# Altium PCB esp32_breakout.PcbDoc
Units mm, origin at the board's own origin, x right, y up, seen from the top; angles counter-clockwise.
Board outline 90.17 x 69.98 mm, 2 copper layers (Top Layer, Bottom Layer), stack 1.569 mm thick; 23 components, 47 nets, 114 pads, 0 vias.
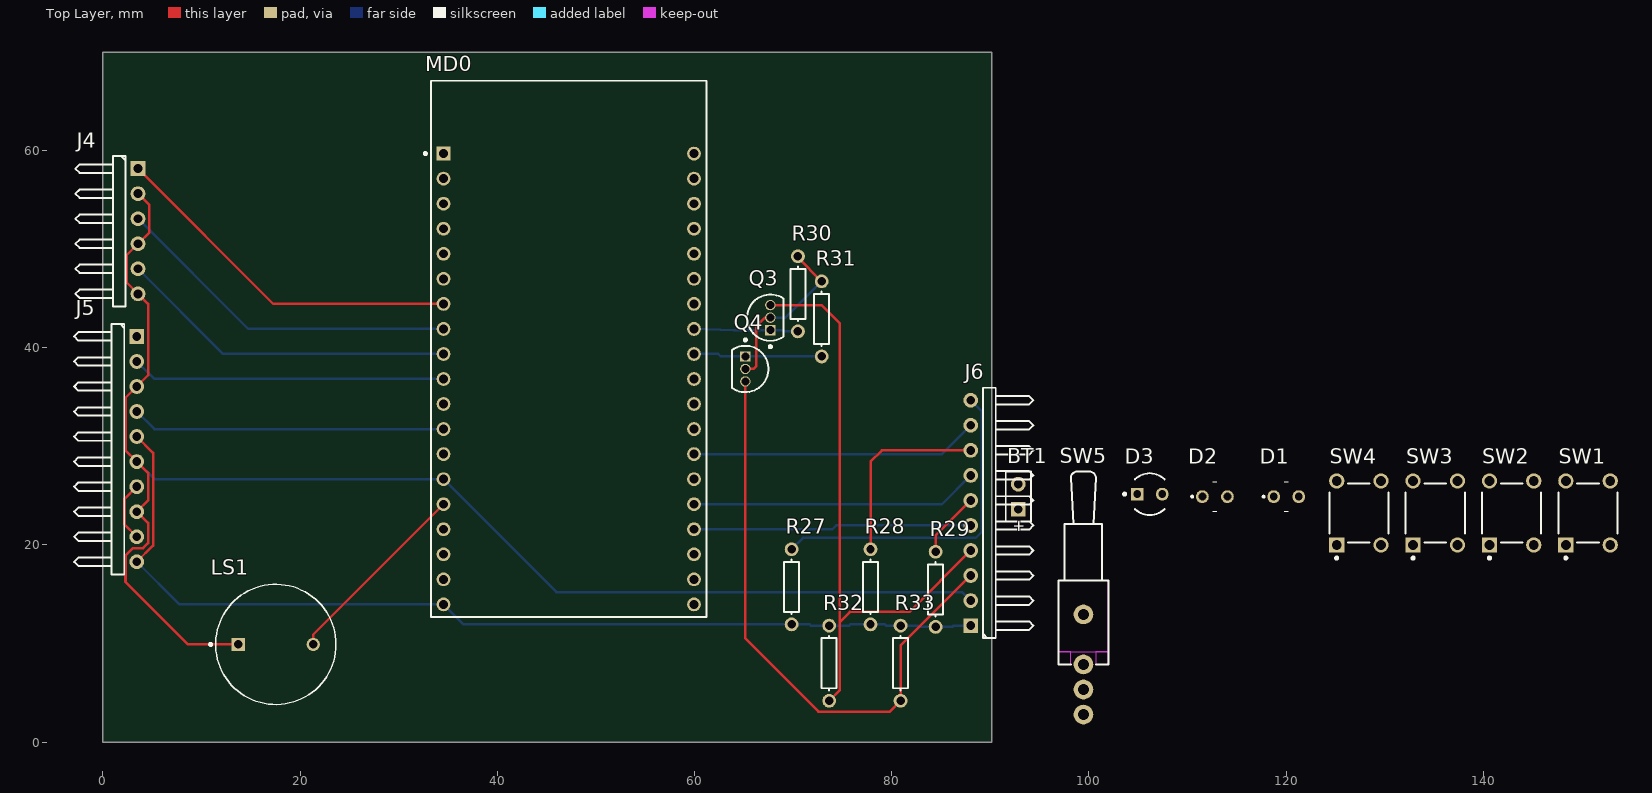
[diagram p0: Top Layer view]
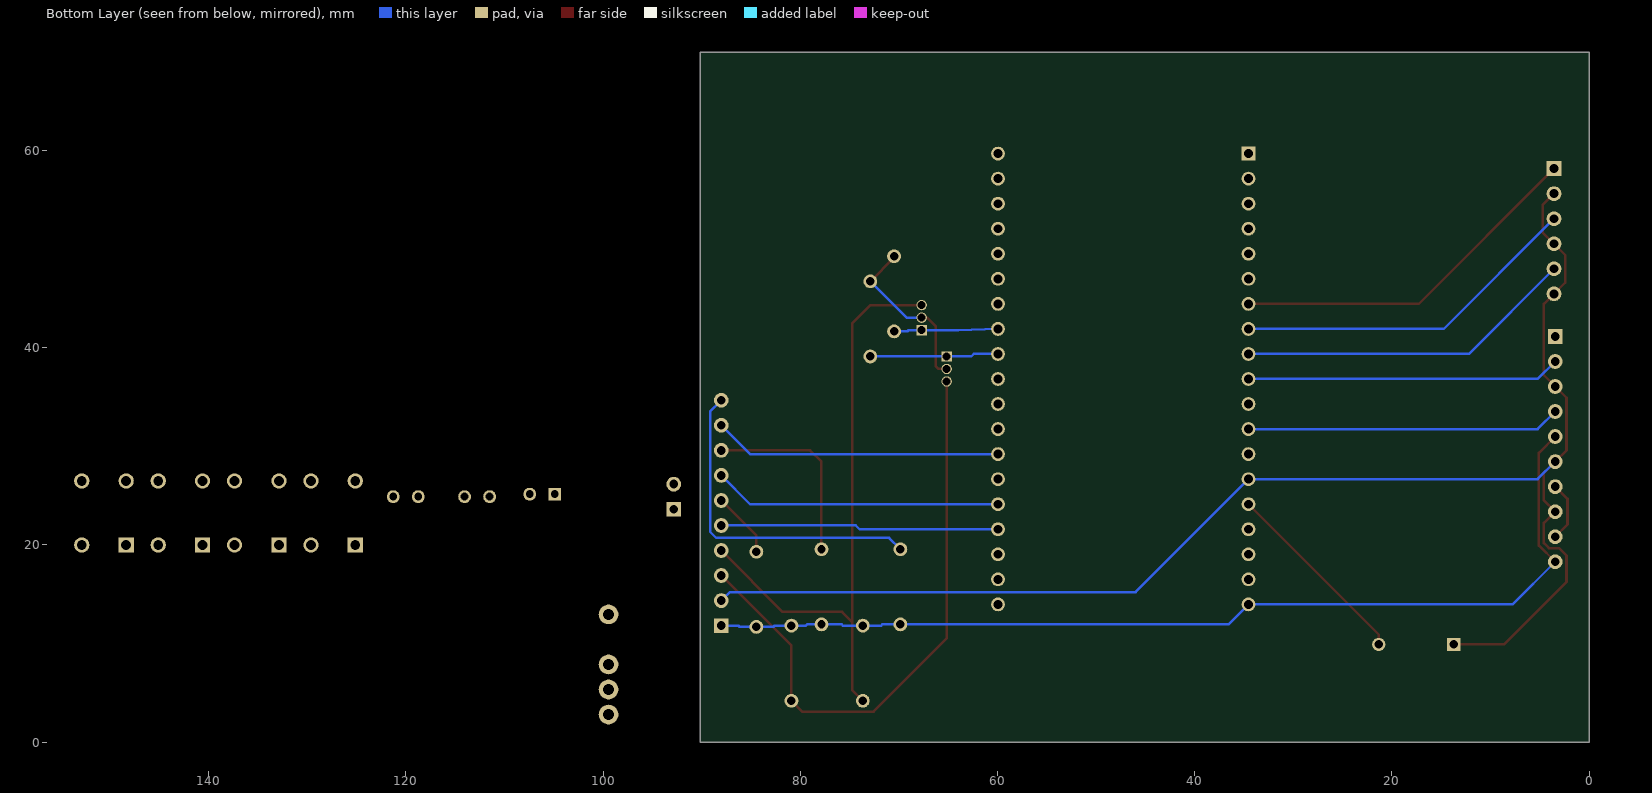
[diagram p1: Bottom Layer view, seen from below]

## Layer stack, top to bottom
Top Solder: solder mask 0.0254, SM-001, Dk 4
Top Layer: signal copper 0.035
Dielectric 1: core 1.4986, Core-043, Dk 4.3
Bottom Layer: signal copper 0.035
Bottom Solder: solder mask 0.0254, SM-001, Dk 4

## Board outline
0,0 90.17,0 90.17,69.977 0,69.977

## Design rules (kind name [scope] priority, off if disabled: settings)
Clearance [All] p1: gap=0.254 ignorepadtopadclearanceinfootprint=FALSE except(0: Arc-Hole Track-Hole SMDPad-Hole THPad-Hole Via-Hole Fill-Hole Poly-Hole Region-Hole Text-Hole)
PolygonConnect [All] p1: connectstyle=Relief reliefconductorwidth=0.254 reliefentries=4 polygonreliefangle="90 Angle" airgapwidth=0.254
RoomDefinition tinee_timer [InComponentClass('tinee_timer')] p1: confinementstyle=ConfineIn formatcopy=TRUE lockcomponents=FALSE outline 91.313,1.524 154.051,1.524 154.051,30.226 91.313,30.226
RoomDefinition U_ESP32_DevKitC_v4_shim [InComponentClass('U_ESP32_DevKitC_v4_shim')] p2: confinementstyle=ConfineIn formatcopy=TRUE lockcomponents=FALSE outline 91.313,31.242 120.65,31.242 120.65,88.9 91.313,88.9
RoomDefinition U_esp32_breakout [InComponentClass('U_esp32_breakout')] p3: confinementstyle=ConfineIn formatcopy=TRUE lockcomponents=FALSE outline 91.313,1.524 184.912,1.524 184.912,29.972 91.313,29.972
RoutingVias [All] p1: holewidth=0.711 width=1.27 viastyle="Through Hole" minholewidth=0.711 minwidth=1.27 maxholewidth=0.711 maxwidth=1.27
SolderMaskExpansion [All] p1: expansion=0.102 istentingtop=FALSE
Width [All] p1: maxlimit=0.254 minlimit=0.254 preferedwidth=0.254
30 further rules are at their usual default settings.

## Classes and differential pairs
component class tinee_timer: BT1 D1 D2 D3 LX-LCBST MG90S SW1 SW2 SW3 SW4 SW5 U1
component class U_ESP32_DevKitC_v4_shim: MD0
component class U_esp32_breakout: J4 J5 J6 LS1 Q3 Q4 R27 R28 R29 R30 R31 R32 R33

## Components (designator, comment, footprint, x,y, rotation, side; value= is the part's Value field where it differs from the comment)
BT1 "Battery" BAT-2 92.837,24.892 r90 top
D1 "LTL-4236N" LTL4236N 118.745,24.892 r0 top
D2 "LTL-4251N" LTL4236N 111.506,24.892 r0 top
D3 "LTL-4222" FP-LTL-4222-MFG 106.172,25.146 r0 top
J4 "Header 6H" HDR1X6H 3.556,58.166 r270 top
J5 "Header 10H" HDR1X10H 3.429,41.148 r270 top
J6 "Header 10H" HDR1X10H 88.011,11.811 r90 top
LS1 "AI-1223-TWT-3V-2-R" FP-AI-1223-TWT-3V-2-R-MFG 17.526,9.906 r0 top
MD0 "ESP32-DevKitC V4" FP-ESP32-DevKitC_V4-MFG 47.244,39.878 r0 top
Q3 "2N7000" ONSC-TO-92-3-29-11 67.691,43.053 r90 top
Q4 "2N7000" ONSC-TO-92-3-29-11 65.151,37.846 r270 top
R27 "Res1" AXIAL-0.3 69.85,15.748 r270 top value=270
R28 "Res1" AXIAL-0.3 77.851,15.748 r270 top value=270
R29 "Res1" AXIAL-0.3 84.455,15.494 r270 top value=270
R30 "Res1" AXIAL-0.3 70.485,45.466 r270 top value=270
R31 "Res1" AXIAL-0.3 72.898,42.926 r90 top value=270
R32 "Res1" AXIAL-0.3 73.66,8.001 r90 top value=270
R33 "Res1" AXIAL-0.3 80.899,8.001 r90 top value=270
SW1 "MJTP1230A" FP-MJTP1230A-MFG 150.622,23.241 r90 top
SW2 "MJTP1230A" FP-MJTP1230A-MFG 142.875,23.241 r90 top
SW3 "MJTP1230A" FP-MJTP1230A-MFG 135.128,23.241 r90 top
SW4 "MJTP1230A" FP-MJTP1230A-MFG 127.381,23.241 r90 top
SW5 "SW-SPDT" TL36WW15050 99.441,7.874 r90 top

## Footprints (in the part's own frame and the unit in brackets; to place one, negate y for a bottom-side part, rotate by r counter-clockwise, add the part's x,y. Pads: shape width x height; smd on the part's side, far side on the other; paste and mask are expansions set on the pad)
AXIAL-0.3 [mm] "Axial Device, Thru-Hole; 2 Leads; 0.3 in Pin Spacing"
  round 1.4 hole 0.85: 1(-3.81,0) 2(3.81,0)
  silkscreen extent -2.77,-0.76 2.77,0.76
BAT-2 [mm] "Battery; 2 Leads"
  rect 1.5x1.5 hole 0.9: 1(-1.27,0)
  round 1.5 hole 0.9: 2(1.27,0)
  silkscreen extent -2.54,-1.27 2.54,1.27
FP-AI-1223-TWT-3V-2-R-MFG [mm]
  rect 1.35x1.35 hole 0.85 paste-1000 mask+0: 1(-3.8,0)
  round 1.35 hole 0.85 paste-1000 mask+0: 2(3.8,0)
  silkscreen extent -6.72,-6.1 6.1,6.1, body extent -6.2,-6.2 6.2,6.2, height 0.25
FP-ESP32-DevKitC_V4-MFG [mm]
  rect 1.4x1.4 hole 0.9 paste-1000 mask+0: 1(-12.7,19.81)
  round 1.4 hole 0.9 paste-1000 mask+0: 2(-12.7,17.27) 3(-12.7,14.73) 4(-12.7,12.19) 5(-12.7,9.65) 6(-12.7,7.11) 7(-12.7,4.57) 8(-12.7,2.03) 9(-12.7,-0.51) 10(-12.7,-3.05) 11(-12.7,-5.59) 12(-12.7,-8.13) 13(-12.7,-10.67) 14(-12.7,-13.21) 15(-12.7,-15.75) 16(-12.7,-18.29) 17(-12.7,-20.83) 18(-12.7,-23.37) 19(-12.7,-25.91) 20(12.7,-25.91) 21(12.7,-23.37) 22(12.7,-20.83) 23(12.7,-18.29) 24(12.7,-15.75) 25(12.7,-13.21) 26(12.7,-10.67) 27(12.7,-8.13) 28(12.7,-5.59) 29(12.7,-3.05) 30(12.7,-0.51) 31(12.7,2.03) 32(12.7,4.57) 33(12.7,7.11) 34(12.7,9.65) 35(12.7,12.19) 36(12.7,14.73) 37(12.7,17.27) 38(12.7,19.81)
  silkscreen extent -14.67,-27.2 13.95,27.2, body extent -14.05,-27.3 14.05,27.3, height 0.25
FP-LTL-4222-MFG [mm]
  rect 1.3x1.3 hole 0.8 paste-1000 mask+0: 1(-1.27,0)
  round 1.3 hole 0.8 paste-1000 mask+0: 2(1.27,0)
  silkscreen extent -2.67,-2.12 1.5,2.12, body extent -2.22,-2.22 2.22,2.22, height 0.25
FP-MJTP1230A-MFG [mm]
  rect 1.55x1.55 hole 1 paste-1000 mask+0: 1(-3.25,2.25)
  round 1.55 hole 1 paste-1000 mask+0: 2(3.25,2.25) 3(-3.25,-2.25) 4(3.25,-2.25)
  silkscreen extent -4.7,-3 3,3, body extent -4.13,-3.13 4.13,3.13, height 0.25
HDR1X6H [mm] "Connector; Header; 6 Position; Right Angle"
  rect 1.5x1.5 hole 0.9: 1(0,0)
  round 1.5 hole 0.9: 2(2.54,0) 3(5.08,0) 4(7.62,0) 5(10.16,0) 6(12.7,0)
  silkscreen extent -1.27,-6.35 13.97,-1.27
HDR1X10H [mm] "Connector; Header; 10 Position; Right Angle"
  rect 1.5x1.5 hole 0.9: 1(0,0)
  round 1.5 hole 0.9: 2(2.54,0) 3(5.08,0) 4(7.62,0) 5(10.16,0) 6(12.7,0) 7(15.24,0) 8(17.78,0) 9(20.32,0) 10(22.86,0)
  silkscreen extent -1.27,-6.35 24.13,-1.27
LTL4236N [mm]
  round 1.3 hole 0.8: 1(0,0) 2(2.54,0)
  silkscreen extent -1.13,-1.5 1.47,1.5, body extent -0.33,-1.62 2.87,1.58, height 19.93
ONSC-TO-92-3-29-11 [mm] "TO, 3-Leads, Body Dia 4.7mm, Pitch 1.27mm"
  rect 1.05x1.05 hole 0.8: 1(-1.27,0)
  round 1.05 hole 0.8: 2(0,0) 3(1.27,0)
  silkscreen extent -3.07,-1.34 2.35,2.35, body extent -2.35,-1.33 2.36,2.36, height 7.87
TL36WW15050 [mm] "Switch; 4 Leads"
  round 2 hole 1.1: 1(0,0) 2(-2.54,0) 3(-5.08,0) M(5.08,0)
  Top Layer keep-out region: 0,-1.27 0,-2.54 1.27,-2.54 1.27,-1.27
  Top Layer keep-out region: 0,2.54 0,1.27 1.27,1.27 1.27,2.54
  Top Layer keep-out region: 1.27,2.54 1.27,-2.54 8.509,-2.54 8.509,2.54
  silkscreen extent 0,-2.54 19.56,2.54

## Part data
BT1: "Multicell Battery", LatestRevisionDate=17-Jul-2002, LatestRevisionNote="Re-released for DXP Platform.", PackageDescription="Battery; 2 Leads", PackageReference=BAT-2, Published=24-Mar-1999, Publisher="Altium Limited"
D1: "LED Round Dome Transparent Colorless Green 569nm 45° 2.1V 10mA DIP TH 3mm × 3mm × 5.85mm", Case/Package=T, Color=Green, Forward Current=30mA, Forward Voltage=2.8V, Lens Color=Colorless, Manufacturer="Diodes Inc.", Manufacturer_Name=Lite-On, Max Operating Temperature=100°C, Max Power Dissipation=100mW, Min Operating Temperature=-55°C, Mouser Part Number=859-LTL-4236N, Reverse Voltage=5V, Test Current=10mA, Arrow Part Number=LTL-4236N, Arrow Price/Stock=https://www.arrow.com/en/products/ltl-4236n/lite-on-technology, Category=LEDs, China RoHS=Compliant, ComponentLink1Description=https://datasheet.octopart.com:443/LTL-4236N-Lite-On-datasheet-180603754.pdf?src-supplier=IHS, ComponentLink1URL=https://datasheet.octopart.com:443/LTL-4236N-Lite-On-datasheet-180603754.pdf?src-supplier=IHS, ComponentLink2Description=https://datasheet.octopart.com:443/LTL-4236N-Lite-On-datasheet-93175.pdf?src-supplier=TME, ComponentLink2URL=https://datasheet.octopart.com:443/LTL-4236N-Lite-On-datasheet-93175.pdf?src-supplier=TME, Country of Origin=Thailand, Datasheet Link=https://media.digikey.com/pdf/Data%20Sheets/Lite-On%20PDFs/LTL-4236N.pdf, Depth=3.2mm, Diameter=3mm, Dominant Wavelength=569nm, Export Control Classification Number (ECCN) Code=EAR99, Harmonized Tariff Schedule (HTS) Code=8541.40.20.00, Height=5.85mm, Illumination Color=Green, Introduction Date=1992-03-31, Lead Free="Lead Free", Length=3.2mm, Lens Style=Clear, Lens Transparency=Clear, Lifecycle Status=Production, LTB Date=2021-02-06, LTD Date=2021-05-31, Luminous Intensity=40mcd, Manufacturer Part Number=LTL-4236N, Manufacturer_Part_Number=LTL-4236N, Mount="Through Hole", Mouser Price/Stock=https://www.mouser.co.uk/ProductDetail/Lite-On/LTL-4236N?qs=%252BY%252Bm5kuB5aiB3WZbX23AGA%3D%3D, Number of Circuits=1, Number of Elements=1, Number of LEDs=1, Number of Pins=2, Number of Terminals=2, Packaging=Bulk, Peak Wavelength=565nm, Power Dissipation=100mW, Pricing 1="1000=0.109, 3000=0.106, 5000=0.105, 15000=0.102, 25000=0.0993 (USD)", Pricing 2="1=0.19, 10=0.132, 50=0.132, 100=0.09, 1000=0.066, 10000=0.052 (USD)", Radiation Hardening=No, REACH SVHC=Affected, RoHS=Compliant, Schedule B="8541402000, 8541402000|8541402000|8541402000|8541402000|8541402000", Shape=Round, Stock 1=973, Stock 2=28604, Supplier 1="Future Electronics", Supplier Part Number 1=LTL-4236N, Terminal Pitch=2.54mm, Viewing Angle=45°, Wavelength=565nm, Width=3.2mm
D2: "LED", Manufacturer_Name=Lite-On, Mouser Part Number=859-LTL-4251N, Arrow Part Number=LTL-4251N, Arrow Price/Stock=https://www.arrow.com/en/products/ltl-4251n/lite-on-technology?region=europe, Datasheet Link=https://media.digikey.com/pdf/Data%20Sheets/Lite-On%20PDFs/LTL-4251N.pdf, Height=5.85mm, Manufacturer_Part_Number=LTL-4251N, Mouser Price/Stock=https://www.mouser.co.uk/ProductDetail/Lite-On/LTL-4251N?qs=ooQFeFo13p6X9Ku12Ljjeg%3D%3D, Supplier 1="Arrow Electronics", Supplier Part Number 1=LTL-4251N
D3: library part CMP-22017-000043-1, "LED RED CLEAR T-1 T/H", Case/Package=T, Color=Red, Forward Current=20mA, Forward Voltage=2V, Max Operating Temperature=100°C, Min Operating Temperature=-55°C, Package Quantity=1000, Power Dissipation=100mW, Reverse Voltage=5V, Test Current=10mA, Depth=4mm, Dominant Wavelength=623nm, Height=6.55mm, Illumination Color=Red, Length=4mm, Lens Color=Red, Lens Style=Dome, Lens Transparency=Clear, Luminous Intensity=29mcd, Mount="Through Hole", Number of Elements=1, Number of LEDs=1, Number of Pins=2, Packaging=Bulk, Radiation Hardening=No, RoHS Compliant=Yes, Series=-, Viewing Angle=20°, Wavelength=635nm
J4: "Header, 6-Pin, Right Angle", LatestRevisionDate=17-Jul-2002, LatestRevisionNote="Re-released for DXP Platform.", Publisher="Altium Limited"
J5 J6: "Header, 10-Pin, Right Angle", LatestRevisionDate=17-Jul-2002, LatestRevisionNote="Re-released for DXP Platform.", Publisher="Altium Limited"
LS1: library part CMP-103888-000003-1, "BUZZER MAGNETIC 3V 12MM TH", Frequency=2.3kHz, Max Operating Temperature=70°C, Max Supply Current=30mA, Max Supply Voltage (DC)=4V, Min Operating Temperature=-20°C, Min Supply Voltage (DC)=2V, Nominal Supply Voltage (DC)=3V, Contact Plating=Tin, Diameter=12mm, Height=7.5mm, Input Type=DC, Mount="Through Hole", Operating Supply Current=30mA, Packaging=Tray, Sensing Method=Magnetic, Series=AI, Termination="PC Pins", Voltage Rating=3V
MD0: library part CMP-194065-000004-1, "WiFi Development Tools (802.11) ESP32 General Development Kit, ESP32-WROOM-32 on the board", Manufacturer=Espressif, Max Frequency=2.5GHz, Max Supply Voltage=5V, Min Supply Voltage=2.7V, Temperature="-40°C to", Temperature Range Low=-40°C, Automotive=No, Bandwidth=2.4-2.5GHz, Category=UNK, ComponentLink2Description=Datasheet, ComponentLink2URL=https://docs.espressif.com/projects/esp-idf/en/latest/get-started/get-started-devkitc.html, Device Class L1="Integrated Circuits (ICs)", Device Class L2="RF Semiconductors and Devices", Device Class L3=Transceivers, Interface=I2C,SPI,UART,I2S, Lead Free=Yes, Manufacturer Part Number="ESP32-DevKitC V4", Number Of Adc Channels=16, Number Of Gpio=22, Octopart=https://octopart.com/esp32-devkitc+v4-espressif+systems-107467262, Package="ESP32-DevKitC V4", RoHS=TRUE
Q3 Q4: library part CMP-1058-00936-1, "Small Signal MOSFET, 200 mA, 60 V, N-Channel, 3-Pin TO-92, Bulk Box", Manufacturer="On Semiconductor", Package Type=TO-92, Channel Polarity="N Channel", Ciss Typ (pF)=60, ComponentLink1Description="Manufacturer URL", ComponentLink1URL=http://www.onsemi.com/, ComponentLink2Description=Datasheet, ComponentLink2URL=http://www.onsemi.com/pub_link/Collateral/2N7000-D.PDF, ComponentLink3Description="Package Specification", ComponentLink3URL=http://www.onsemi.cn/pub_link/Collateral/2N6426-D.PDF, Configuration=Single, Coss Typ (pF)=25, Crss Typ (pF)=5, DatasheetVersion="Rev. 8", ID Max (A)=0.2, Mounting Technology="Through Hole", PackageDescription="3-Pin Transistor Outline, Body 4.825 x 3.685 mm, Pitch 1.27 mm", PackageReference=TO-92-3-29-11_AM_SL, PackageVersion="Rev. AM", Packing="Bulk Box", PartNumber=2N7000, PD Max (W)=0.35, V(BR)DSS Min (V)=60, VGS Max (V)=20, VGS(th) Max (V)=3
R27 R28 R29 R30 R31 R32 R33: "Resistor", LatestRevisionDate=17-Jul-2002, LatestRevisionNote="Re-released for DXP Platform.", PackageDescription="Axial Device, Thru-Hole; 2 Leads; 0.3 in Pin Spacing", PackageReference=AXIAL-0.3, Published=8-Jun-2000, Publisher="Altium Limited"
SW1 SW2 SW3 SW4: library part CMP-47024-000004-1, "SWITCH TACTILE SPST-NO 0.05A 12V", Actuator Color=Black, Contact Resistance=100mR, Current Rating=50mA, Max Operating Temperature=70°C, Max Voltage Rating (DC)=12V, Min Operating Temperature=-20°C, Operating Force=160gf, Package Quantity=2000, Actuator Length=1.4mm, Actuator Material=Thermoplastic, Actuator Type=Standard, Color=Black, Contact Material=Bronze, Contact Plating=Silver, Electrical Life=100000Cycles, Illumination Type=Non-Illuminated, Mechanical Life=100000Cycles, Mount="Through Hole", Orientation=Straight, Packaging=Bulk, REACH SVHC="No SVHC", RoHS Compliant=Yes, Series=MJTP, Switch Function=Off-Mom, Switch Travel=0.25mm, Termination="PC Pin", Throw Configuration=SPST, Voltage Rating (DC)=12V
SW5: "SPDT Subminiature Toggle Switch, Right Angle Mounting, Vertical Actuation", ComponentLink1Description="Manufacturer Link", ComponentLink1URL=http://www.apem.com, DatasheetVersion=05-Dec-2000, LatestRevisionDate=17-Dec-2003, LatestRevisionNote="Schematic revised, PCB Footprint replaced.", PackageDescription="Switch; 4 Leads", PackageReference=TL36WW15050, Published=24-Mar-1999, Publisher="Altium Limited"

## Nets (pads, with @x,y where several pads share a name; then routed paths per layer and width w, separated by ;. In a path a pad name is that pad's centre, name@x,y a point inside that pad or via, vN(x,y) a via of type N, cw(c..) or ccw(c..) an arc to the next point about the centre after c; other vN are vias at no path point)
5V: J5.5 J5.10 J6.1 MD0.19 R27.2 R28.2 R29.2 R32.2 R33.2 | length 101.5
  Top Layer w0.254: J5.10 5.08,19.939 5.08,29.337 J5.5
  Bottom Layer w0.254: J5.10 7.749,13.968 MD0.19 36.574,11.938 R27.2 71.679,11.938 71.806,11.811 R32.2 75.692,11.811 75.819,11.938 R28.2 79.299,11.938 79.426,11.811 R33.2 82.601,11.811 82.728,11.684 R29.2 86.157,11.684 86.284,11.811 J6.1
B+: BT1.1
B-: BT1.2
BTN_MINUS: J4.5 MD0.9 | length 34.6
  Bottom Layer w0.254: J4.5 12.194,39.368 MD0.9
BTN_MODE: J4.1 MD0.7 | length 36.7
  Top Layer w0.254: J4.1 17.274,44.448 MD0.7
BTN_PLAY: J5.2 MD0.10 | length 31.9
  Bottom Layer w0.254: J5.2 5.209,36.828 MD0.10
BTN_PLUS: J4.3 MD0.8 | length 35.6
  Bottom Layer w0.254: J4.3 14.734,41.908 MD0.8
CHG: J5.7 J5.9 | length 6.1
  Top Layer w0.254: J5.9 2.184,22.073 2.184,24.663 J5.7
CLK: MD0.20
CMD: MD0.18
DISP_CLK_3V3: MD0.31 Q3.1 R30.2 | length 10.6
  Bottom Layer w0.254: MD0.31 63.955,41.783 Q3.1 69.012,41.783 69.139,41.656 R30.2
DISP_CLK_5V: J6.4 Q3.3 R32.1 | length 62.8
  Top Layer w0.254: Q3.3 72.898,44.323 74.752,42.469 74.752,12.192 ; R32.1 74.752,5.283 74.752,12.192 ; J6.4 81.788,13.208 75.768,13.208 74.752,12.192
DISP_DIO_3V3: MD0.30 Q4.1 R31.1 | length 13.1
  Bottom Layer w0.254: MD0.30 62.408,39.368 62.66,39.116 Q4.1 R31.1
DISP_DIO_5V: J6.3 Q4.3 R33.1 | length 61
  Top Layer w0.254: Q4.3 65.151,10.516 72.568,3.099 79.807,3.099 R33.1 80.899,9.779 J6.3
EN: MD0.2
GND: J4.2 J4.4 J4.6 J5.3 J5.6 J5.8 J6.2 LS1.1 MD0.14 | length 150.6
  Top Layer w0.254: J4.2 4.699,54.483 4.699,51.689 J4.4 2.413,49.403 2.413,46.609 J4.6 4.572,44.45 4.572,37.211 J5.3 2.286,34.925 2.286,29.591 J5.6 4.572,27.305 4.572,24.511 J5.8 4.572,22.225 4.572,20.193 4.064,19.685 3.048,19.685 2.286,18.923 2.286,16.256 8.636,9.906 LS1.1
  Bottom Layer w0.254: J5.6 5.209,26.668 MD0.14 45.997,15.215 87.147,15.215 J6.2
GND1: MD0.38
GND2: MD0.32
IO0: MD0.25
IO2: J6.7 MD0.24 | length 29.3
  Bottom Layer w0.254: MD0.24 85.088,24.128 J6.7
IO4: J6.9 MD0.26 | length 29.3
  Bottom Layer w0.254: MD0.26 85.088,29.208 J6.9
IO5: MD0.29
IO12: MD0.13
IO13: LS1.2 MD0.15 | length 19.7
  Top Layer w0.254: LS1.2 21.326,10.91 MD0.15
IO14: J5.4 MD0.12 | length 31.9
  Bottom Layer w0.254: J5.4 5.209,31.748 MD0.12
IO15: J6.5 MD0.23 | length 28.2
  Bottom Layer w0.254: MD0.23 73.99,21.588 74.373,21.971 J6.5
IO16: MD0.27
IO17: MD0.28
IO21: MD0.33
IO22: MD0.36
IO23: MD0.37
IO27: MD0.11
IO34: MD0.5
IO35: MD0.6
NetD1_2: J6.10 R27.1 | length 33.8
  Bottom Layer w0.254: R27.1 70.993,20.701 88.519,20.701 89.154,21.336 89.154,33.528 J6.10
NetD2_2: J6.8 R28.1 | length 19.5
  Top Layer w0.254: R28.1 77.851,28.448 78.994,29.591 J6.8
NetD3_2: J6.6 R29.1 | length 6.7
  Top Layer w0.254: R29.1 84.455,20.955 J6.6
NetQ3_2: Q3.2 Q4.2 R30.1 R31.2 | length 17.3
  Top Layer w0.254: Q4.2 65.989,37.846 66.243,38.1 66.243,42.164 67.132,43.053 Q3.2 ; R30.1 70.485,49.149 R31.2
  Bottom Layer w0.254: Q3.2 69.215,43.053 R31.2
RXD0: MD0.34
SD0: MD0.21
SD1: MD0.22
SD2: MD0.16
SD3: MD0.17
SENSOR_VN: MD0.4
SENSOR_VP: MD0.3
TXD0: MD0.35
VDD33: MD0.1
pads on no net: D1.1 D1.2 D2.1 D2.2 D3.1 D3.2 J5.1 SW1.1 SW1.2 SW1.3 SW1.4 SW2.1 SW2.2 SW2.3 SW2.4 SW3.1 SW3.2 SW3.3 SW3.4 SW4.1 SW4.2 SW4.3 SW4.4 SW5.1 SW5.2 SW5.3 SW5.M

## Text inside footprints (layer, text, board x,y; h text height)
BT1: Top Overlay "+" at 93.414,21.222 h1.15 r90